# EAGLE board AHT20 (EAGLE 9.6.2)
REV: B
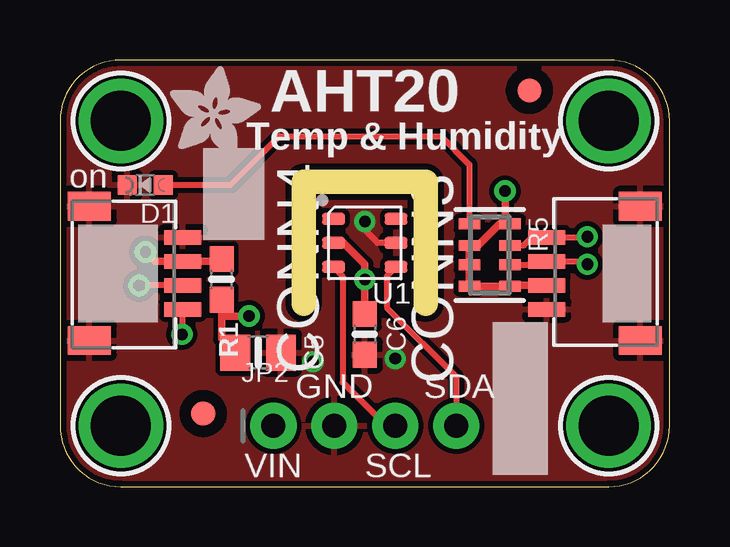
[diagram p0: board, top side]
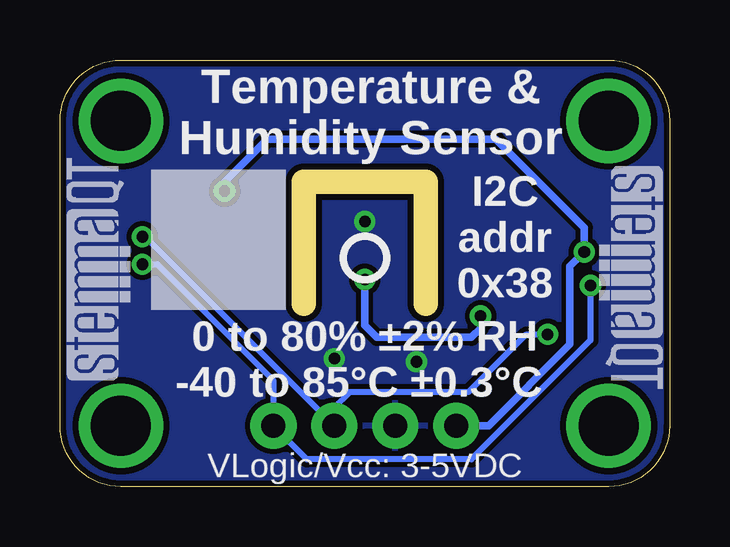
[diagram p1: board, bottom side, seen from below]

Size 25.4 x 17.78 mm. Coordinates in mm from the lower left corner, seen from the top.
Outline: 10.16,7.62 10.16,12.7 15.24,12.7 15.24,7.62
Outline: 0,15.24 0,2.54 arc90 2.54,0 22.86,0 arc90 25.4,2.54 25.4,15.24 arc90 22.86,17.78 2.54,17.78 arc90 0,15.24
Copper layers (1*16): Top 0.035mm / dielectric 1.5mm / Bottom 0.035mm
Design rules "adafruit": minimum track width 8mil, minimum drill 15.5mil, track to track 8mil, track to pad 8mil, pad to pad 8mil, via to via 8mil, smd to smd 8mil, copper to edge 10mil, drill to drill 8mil, minimum pad ring 10mil, minimum via ring 8mil, stop-mask expansion 2mil, vias tented up to drill 20mil, thermal gap 10mil
Net classes: 1 highpower: width 0.305 mm, drill 0.483 mm; 2 lowpower: width 0.254 mm, drill 0.483 mm

## Footprints (pad centres in the part's own frame; a part is rotated, then mirrored left to right if it is on the bottom)
0805-NO = smd 1.24 x 1.5: 1 -0.95,0; 2 0.95,0
0603-NO = smd 1.075 x 1: 1 -0.85,0; 2 0.85,0
JST_SH4 = smd 0.6 x 1.55: 1 -1.5,2.006; 2 -0.5,2.006; 3 0.5,2.006; 4 1.5,2.006 | smd 1.2 x 1.8: MT1 -2.8,-1.894; MT2 2.8,-1.894
CHIPLED_0603_NOOUTLINE = smd 0.8 x 0.8: A 0,-0.75; C 0,0.75
FIDUCIAL_1MM = smd 1 x 1: 1 0,0
1X04_ROUND_76 = drill 1 pad 1.93: 1 -3.81,0; 2 -1.27,0; 3 1.27,0; 4 3.81,0
RESPACK_4X0603 = smd 0.45 x 0.9: 1 -1.3,-0.85; 2 -0.4,-0.85; 3 0.4,-0.85; 4 1.3,-0.85; 5 1.3,0.85; 6 0.4,0.85; 7 -0.4,0.85; 8 -1.3,0.85
LONGAN-IC_SNR6-1.0-3X3X1MM = smd 0.95 x 0.5: 1 1.3,-1; 2 1.3,0; 3 1.3,1; 4 -1.3,1; 5 -1.3,0; 6 -1.3,-1
MOUNTINGHOLE_2.5_PLATED = drill 2.5 pad 3.2: P$1 0,0

## Placement (x,y rotation side)
C5  10uF  [0805-NO]  8.26,5.59 0 top
C6  0.1uF  [0603-NO]  12.7,6.35 270 top
CONN3  STEMMA_I2C_QT  [JST_SH4]  22.29,8.89 90 top
CONN4  STEMMA_I2C_QT  [JST_SH4]  3.11,8.89 270 top
D1  GREEN  [CHIPLED_0603_NOOUTLINE]  3.56,12.57 90 top
FID3  FIDUCIAL_1MM  [FIDUCIAL_1MM]  5.97,3.05 0 top
FID4  FIDUCIAL_1MM  [FIDUCIAL_1MM]  19.56,16.51 0 top
JP2  [1X04_ROUND_76]  12.7,2.54 0 top
R1  220  [0603-NO]  6.73,8.64 270 top
R5  10K Pack  [RESPACK_4X0603]  17.91,9.65 270 top
U1  AHT20  [LONGAN-IC_SNR6-1.0-3X3X1MM]  12.7,10.16 180 top
U$19  MOUNTINGHOLE2.5  [MOUNTINGHOLE_2.5_PLATED]  2.54,15.24 0 top
U$20  MOUNTINGHOLE2.5  [MOUNTINGHOLE_2.5_PLATED]  22.86,15.24 0 top
U$22  MOUNTINGHOLE2.5  [MOUNTINGHOLE_2.5_PLATED]  2.54,2.54 0 top
U$25  MOUNTINGHOLE2.5  [MOUNTINGHOLE_2.5_PLATED]  22.86,2.54 0 top
U$28  [ADAFRUIT_3.5MM]  4.57,13.72 0 top
U$29  [PCBFEAT-REV-040]  12.7,9.53 0 bottom
U$30  [STEMMAQT]  22.48,4.45 90 bottom
U$31  [STEMMAQT]  2.92,13.34 270 bottom

## Library data of the parts
C5 C6 JP2 R1 R5 U$28 U$29 = microbuilder
CONN3 CONN4 = adafruit_electromech; LCSC: C2845363
D1 = microbuilder; JLC_ROTATION: 270
FID3 FID4 = microbuilder; BOM: EXCLUDE
U1 = adafruit_sensor; LCSC_PART: C2757850
U$19 U$20 U$22 U$25 = adafruit_electromech; BOM: EXCLUDE
U$30 U$31 = silks

## Nets
GND: C5.2 C6.2 CONN3.1 CONN3.MT1 CONN3.MT2 CONN4.1 CONN4.MT1 CONN4.MT2 D1.C JP2.2 U1.5
N$1: D1.A R5.1
SCL: CONN3.4 CONN4.4 JP2.3 R5.7 U1.3
SDA: CONN3.3 CONN4.3 JP2.4 R5.6 U1.4
VCC [highpower]: CONN3.2 CONN4.2 JP2.1 R1.1 R5.2 R5.3 R5.4 R5.5 R5.8
VDD: C5.1 C6.1 R1.2 U1.2

## Tracks (layer width: path | path; a pad name or v marks a point on that pad's centre or on a via)
GND  (via drill 0.48)
  Top 0.254: U1.5 13.24,10.16 12.7,10.7 v12.7,11.05
  other vias: 13.97,5.33 10.54,5.21
  pour Top: 0,17.78 25.4,17.78 25.4,0 0,0
  pour Bottom: 0,17.78 25.4,17.78 25.4,0 0,0
N$1
  Top 0.254: D1.A 7.11,12.57 9.14,14.61 15.88,14.61 17.06,13.42 R5.1
SCL  (via drill 0.48)
  Top 0.254: JP2.3 13.59,2.54 11.78,4.35 11.78,8.78 U1.3 | R5.7 19.32,10.05 19.66,10.39 CONN3.4 21.95,10.39 v21.97,10.41 | CONN4.4 5.1,7.39 5.1,6.37 v5.08,6.35
  Bottom 0.254: v21.97,10.41 21.84,10.41 JP2.3 13.97,3.3 13.34,3.94 8.38,3.94 5.97,6.35 v5.08,6.35
SDA  (via drill 0.48)
  Top 0.254: U1.4 13.62,8.78 13.62,7.46 16.51,4.57 JP2.4 | R5.6 19.54,9.25 19.68,9.4 20.53,9.4 20.52,9.39 CONN3.3 21.85,9.39 v21.97,9.27 | CONN4.3 v3.31,8.39 v3.3,8.38
  Bottom 0.254: v21.97,9.27 21.35,9.27 16.51,4.43 JP2.4 15.11,1.14 8.26,1.14 3.3,6.1 v3.3,8.38
VCC  (via drill 0.48)
  Top 0.305: CONN3.2 18.8,8.39 R5.5 R5.4 R5.3 R5.2 17.42,10.05 18.32,10.95 18.54,10.95 | R5.8 18.54,10.95 | R1.1 6.63,9.39 CONN4.2 3.94,9.39 v3.56,9.78 | v18.54,12.32 18.54,10.95
  Bottom 0.305: JP2.1 7.54,2.54 4.15,5.93 4.15,9.18 v3.56,9.78 3.56,10.79 7.24,14.48 16.76,14.48 18.54,12.7 v18.54,12.32
VDD  (via drill 0.48)
  Top 0.305: C5.1 6.73,6.16 R1.2 6.73,7.11 v7.87,7.11 | C6.1 v12.7,8.64 12.7,9.27 11.81,10.16 U1.2
  Bottom 0.305: v7.87,7.11 7.87,6.6 8.26,6.22 12.19,6.22 12.7,6.73 v12.7,8.64

## Text on the board
tPlace: AHT20 | Temp & Humidity | on | GND | SDA | VIN | SCL
bPlace: Temperature & / Humidity Sensor | I2C / addr / 0x38 | 0 to 80% ±2% RH / -40 to 85°C ±0.3°C | VLogic/Vcc: 3-5VDC